# Altium PCB CH32X315MCU-R0-1v0.PcbDoc (part 2 of 2)
Units mil, origin at the board's own origin, x right, y up, seen from the top; angles counter-clockwise.
Board outline 2755.91 x 3228.35 mil, 4 copper layers (Top Layer, Layer 1, Layer 2, Bottom Layer), stack 23.756 mil thick; 75 components, 121 nets, 391 pads, 568 vias.
Unrouted connection lines stored in the file: 7.
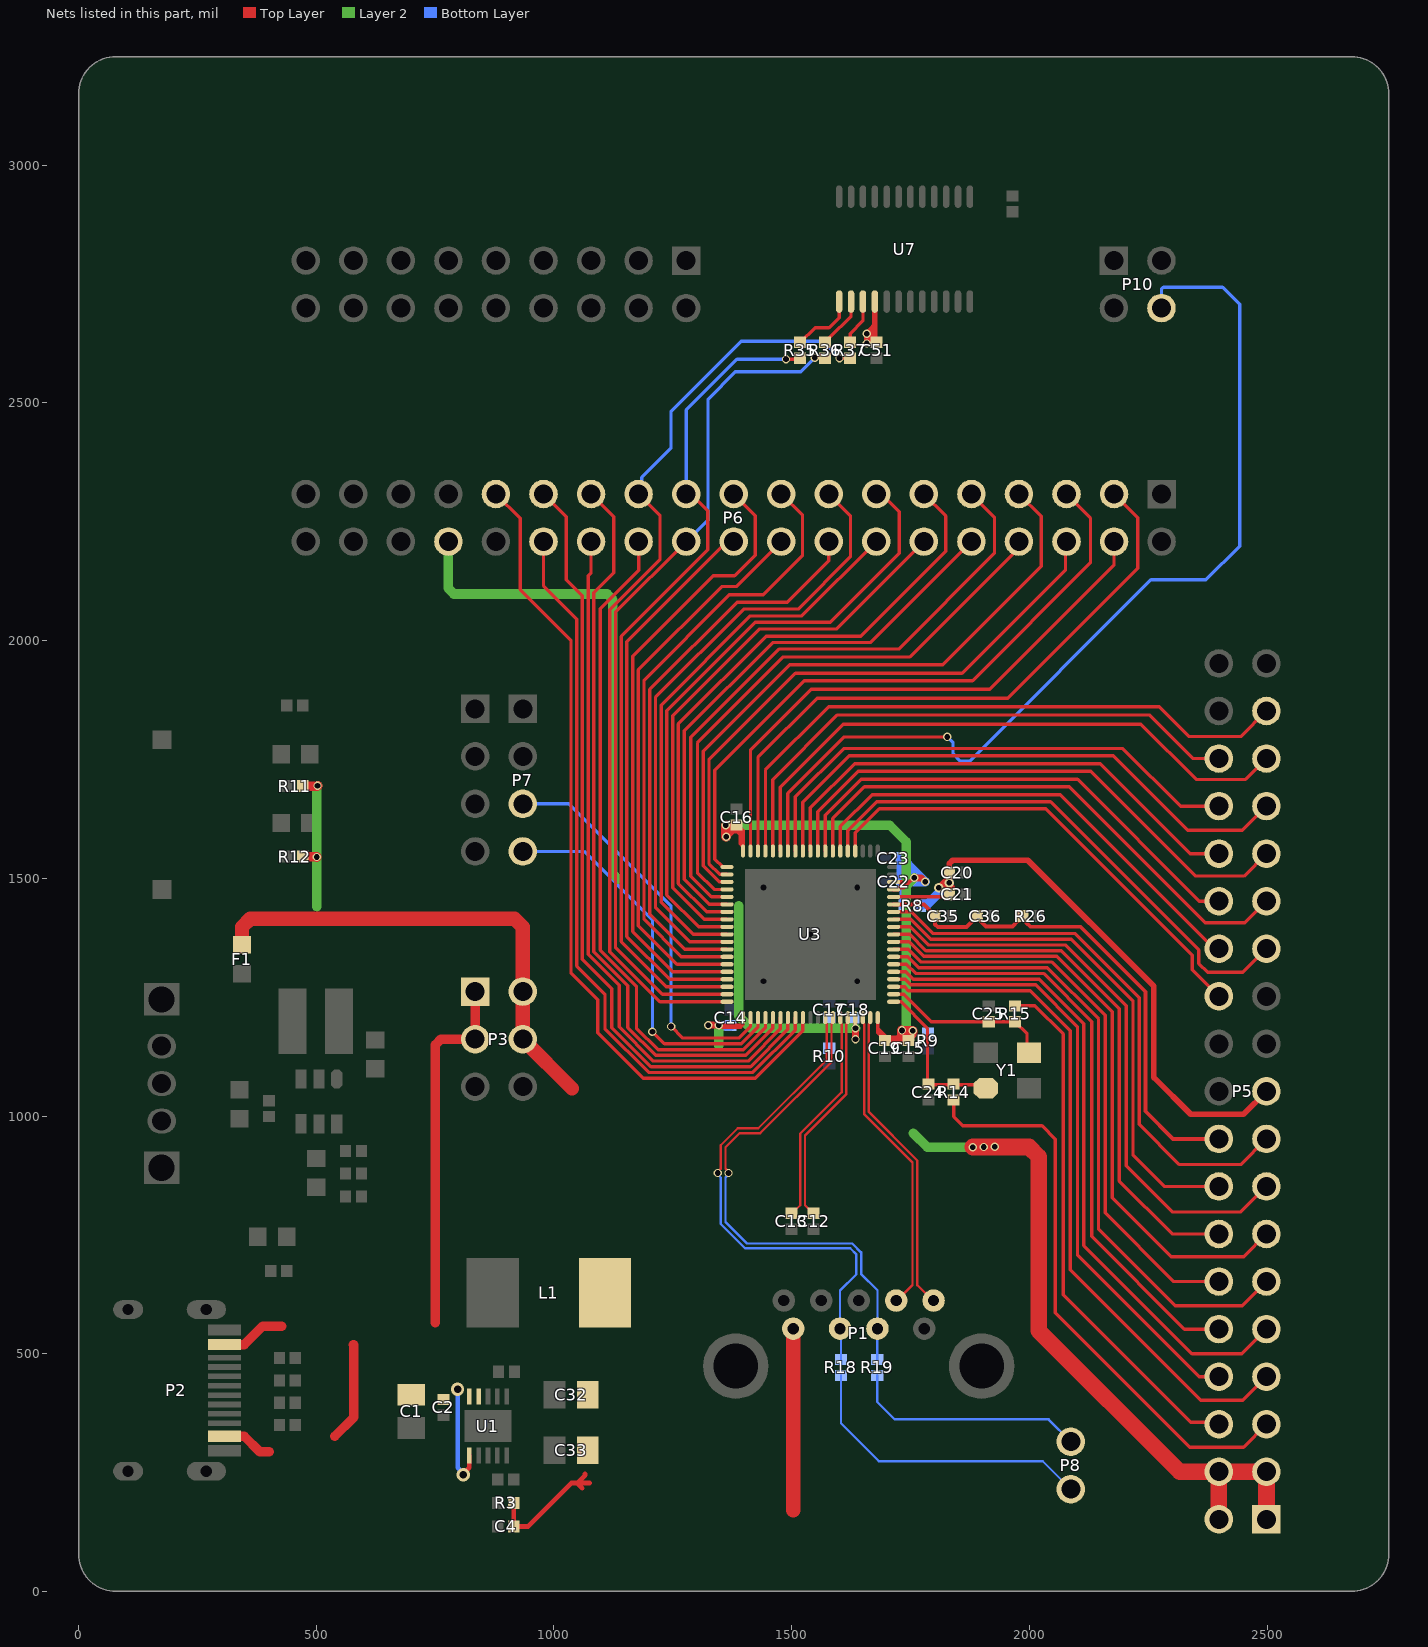
[diagram p4: the nets of this part, all layers, seen from the top]

## Via types
v1: diameter 19.68, hole 11.81, Top Layer to Bottom Layer, tented both sides, 297 vias
v2: diameter 17.72, hole 11.81, Top Layer to Bottom Layer, tented both sides, 257 vias
v3: diameter 23.62, hole 11.81, Top Layer to Bottom Layer, tented both sides, 8 vias
v4: diameter 23.62, hole 11.81, Top Layer to Bottom Layer, 4 vias
v5: diameter 27.56, hole 15.75, Top Layer to Bottom Layer, tented both sides, 2 vias

## Nets (pads, with @x,y where several pads share a name; then routed paths per layer and width w, separated by ;. In a path a pad name is that pad's centre, name@x,y a point inside that pad or via, vN(x,y) a via of type N, cw(c..) or ccw(c..) an arc to the next point about the centre after c; other vN are vias at no path point) (continued)
PA5: P5.24 U3.23 | length 1005.2
  Top Layer w7: U3.23@1633.67,1557.29 1633.67,1595.46 1684.51,1646.29 2034.4,1646.29 2342.39,1338.3 2342.39,1307.9 P5.24@2398.45,1251.84
PA6: P5.25 U3.24 | length 1134.4
  Top Layer w7: U3.24@1617.93,1557.29 1617.93,1599.93 1678.97,1660.97 2044.31,1660.97 2356.12,1349.17 2356.12,1320.73 2374.79,1302.05 2448.66,1302.05 P5.25@2498.45,1351.84
PA7: P5.26 U3.25 | length 1010
  Top Layer w7: U3.25@1602.18,1557.29 1602.18,1609 1669.13,1675.96 2065,1675.96 2389.11,1351.84 P5.26@2398.45,1351.84
PA8: P6.19 U3.53 | length 1305.8
  Top Layer w7: U3.53@1363.99,1303.35 1249.95,1303.35 1165.36,1387.94 1165.36,1966.66 1334.8,2136.1 1379.73,2136.1 1423.25,2179.61 1423.25,2262.91 P6.19@1377.95,2308.21
PA9: P6.20 U3.54 | length 1180
  Top Layer w7: U3.54@1363.99,1287.61 1243.18,1287.61 1153.36,1377.43 1153.36,1997.82 1363.74,2208.21 P6.20@1377.95,2208.21
PA10: P6.21 R35.2 U3.55 | length 1764.9
  Top Layer w7: P6.21@1277.95,2308.21 1288.41,2308.21 1323.52,2273.1 1323.52,2190.79 1141.36,2008.63 1141.36,1366.92 1236.42,1271.86 U3.55@1363.99,1271.86 ; v2(1488.02,2591.54) 1515.25,2591.54 R35.2@1517.47,2593.76
  Bottom Layer w7: P6.21@1277.95,2308.21 1277.95,2353.5 1278.25,2353.79 1278.25,2484.92 1384.86,2591.54 v2(1488.02,2591.54)
PA11: P6.22 R36.2 U3.56 | length 1791.6
  Top Layer w7: P6.22@1277.95,2208.21 1129.36,2059.61 1129.36,1354.94 1228.19,1256.11 U3.56@1363.99,1256.11 ; v2(1548.2,2594.5) 1569.43,2594.5 R36.2@1570.17,2593.76
  Bottom Layer w7: P6.22@1277.95,2208.21 1323.97,2254.22 1323.97,2508.03 1381.47,2565.53 1519.23,2565.53 v2(1548.2,2594.5)
PA12: P6.23 R37.2 U3.57 | length 1969.3
  Top Layer w7: P6.23@1177.95,2308.21 1222.79,2263.37 1222.79,2170.02 1117.36,2064.58 1117.36,1345.81 1222.81,1240.36 U3.57@1363.99,1240.36 ; v2(1600.57,2593.4) 1622.51,2593.4 R37.2@1622.87,2593.76
  Bottom Layer w7: P6.23@1177.95,2308.21 1184.53,2314.79 1184.53,2343.11 1246.06,2404.63 1246.06,2481.29 1393.96,2629.19 1564.77,2629.19 v2(1600.57,2593.4)
PA13: P7.3 U3.59 | length 859.7
  Top Layer w7: v2(1246.19,1188.3) 1270.51,1163.98 1388.96,1163.98 1413.2,1188.22 U3.59@1413.2,1206.9
  Bottom Layer w7: P7.3@934.34,1656.48 1030.87,1656.48 1246.19,1441.15 v2(1246.19,1188.3)
PA14: P7.4 U3.60 | length 834.5
  Top Layer w7: v2(1207.07,1177.24) 1232.34,1151.98 1393.93,1151.98 1428.95,1186.99 U3.60@1428.95,1206.9
  Bottom Layer w7: P7.4@934.34,1556.48 1063.25,1556.48 1207.07,1412.66 v2(1207.07,1177.24)
PA15: P6.24 U3.61 | length 1418.7
  Top Layer w7: P6.24@1177.95,2208.21 1177.95,2147.58 1097.19,2066.82 1097.19,1349.01 1173.53,1272.67 1173.53,1184.83 1218.83,1139.52 1398.45,1139.52 1444.7,1185.77 U3.61@1444.7,1206.9
PB0: P5.27 U3.26 | length 1145.6
  Top Layer w7: U3.26@1586.43,1557.29 1586.43,1625.77 1653.08,1692.42 2083.42,1692.42 2369.66,1406.18 2452.79,1406.18 P5.27@2498.45,1451.84
PB1: P5.28 U3.27 | length 1040.4
  Top Layer w7: U3.27@1570.68,1557.29 1570.68,1632.31 1646.57,1708.2 2101.08,1708.2 2357.43,1451.84 P5.28@2398.45,1451.84
PB2: P5.29 U3.28 | length 1172.4
  Top Layer w7: U3.28@1554.93,1557.29 1554.93,1640.27 1639.65,1724.99 2129.35,1724.99 2349.64,1504.7 2451.31,1504.7 P5.29@2498.45,1551.84
PB3: P5.30 U3.29 | length 1067.1
  Top Layer w7: U3.29@1539.19,1557.29 1539.19,1648.2 1632.16,1741.17 2149.02,1741.17 2338.35,1551.84 P5.30@2398.45,1551.84
PB4: P5.31 U3.30 | length 1204.2
  Top Layer w7: U3.30@1523.44,1557.29 1523.44,1660.32 1620.88,1757.76 2176.59,1757.76 2333.12,1601.24 2447.85,1601.24 P5.31@2498.45,1651.84
PB5: P5.32 U3.31 | length 1097
  Top Layer w7: U3.31@1507.69,1557.29 1507.69,1671.29 1609.31,1772.91 2196.66,1772.91 2317.73,1651.84 P5.32@2398.45,1651.84
PB6: P10.4 U3.32 | length 2072.1
  Top Layer w7: U3.32@1491.94,1557.29 1491.94,1678.39 1610.82,1797.27 v2(1827.33,1797.27)
  Bottom Layer w7: v2(1827.33,1797.27) 1839.28,1785.32 1839.28,1761.78 1854.42,1746.64 1874.48,1746.64 2255.56,2127.72 2371.31,2127.72 2442.14,2198.55 2442.14,2707.19 2406.07,2743.25 2281.79,2743.25 2277.69,2739.15 P10.4@2277.69,2699.25
PB7: P5.33 U3.33 | length 1278
  Top Layer w7: U3.33@1476.19,1557.29 1476.19,1691.8 1608.66,1824.27 2234.57,1824.27 2350.89,1707.95 2454.55,1707.95 P5.33@2498.45,1751.84
PB8: P6.9 U3.43 | length 1331
  Top Layer w7: U3.43@1363.99,1460.83 1331.12,1460.83 1287.37,1504.58 1287.37,1796.36 1473.12,1982.1 1725.41,1982.1 1926.49,2183.19 1926.49,2259.67 P6.9@1877.95,2308.21
PB9: P6.10 U3.44 | length 1192.6
  Top Layer w7: U3.44@1363.99,1445.09 1326.69,1445.09 1274.3,1497.48 1274.3,1810.08 1459.96,1995.74 1665.48,1995.74 P6.10@1877.95,2208.21
PB10: P6.11 U3.45 | length 1315.1
  Top Layer w7: U3.45@1363.99,1429.34 1321.23,1429.34 1261.64,1488.93 1261.64,1824.62 1446.05,2009.03 1645.14,2009.03 1824.16,2188.05 1824.16,2262.01 P6.11@1777.95,2308.21
PB11: P6.12 U3.46 | length 1184.1
  Top Layer w7: U3.46@1363.99,1413.59 1315.88,1413.59 1249.64,1479.82 1249.64,1842.22 1431.67,2024.25 1594,2024.25 P6.12@1777.95,2208.21
PB12: P6.25 U3.62 | length 1564.1
  Top Layer w7: P6.25@1077.95,2308.21 1125.42,2260.74 1125.42,2142.37 1083.72,2100.67 1083.72,1345.51 1155.34,1273.89 1155.34,1186.05 1213.86,1127.52 1403.42,1127.52 1460.45,1184.55 U3.62@1460.45,1206.9
PB13: P6.26 U3.63 | length 1471
  Top Layer w7: P6.26@1077.95,2208.21 1077.95,2142.33 1071.72,2136.1 1071.72,1340.53 1137.14,1275.12 1137.14,1187.27 1208.89,1115.52 1408.39,1115.52 1476.19,1183.33 U3.63@1476.19,1206.9
PB14: P6.27 U3.64 | length 1643.6
  Top Layer w7: P6.27@977.95,2308.21 1025.8,2260.36 1025.8,2128.04 1059.72,2094.11 1059.72,1329.96 1121.68,1268 1121.68,1185.77 1203.92,1103.52 1413.36,1103.52 1491.94,1182.1 U3.64@1491.94,1206.9
PB15: P6.28 U3.65 | length 1580
  Top Layer w7: P6.28@977.95,2208.21 977.95,2114.63 1047.72,2044.86 1047.72,1315.4 1107.25,1255.87 1107.25,1183.22 1198.95,1091.52 1418.33,1091.52 1507.69,1180.88 U3.65@1507.69,1206.9
PC0: P5.10 U3.6 | length 1266.3
  Top Layer w7: U3.6@1714.38,1319.1 1741.1,1319.1 1760.44,1299.77 2029.59,1299.77 2130.86,1198.5 2130.86,747.07 2326.09,551.84 P5.10@2398.45,551.84
PC1: P5.11 U3.7 | length 1368.4
  Top Layer w7: U3.7@1714.38,1334.85 1744.39,1334.85 1767.47,1311.77 2037.64,1311.77 2145.33,1204.09 2145.33,761.77 2306.33,600.77 2447.37,600.77 P5.11@2498.45,651.84
PC2: P5.12 U3.8 | length 1217.1
  Top Layer w7: U3.8@1714.38,1350.6 1745.61,1350.6 1772.44,1323.77 2047.52,1323.77 2159.32,1211.97 2159.32,796.11 2303.6,651.84 P5.12@2398.45,651.84
PC3: P5.13 U3.9 | length 1307.3
  Top Layer w7: U3.9@1714.38,1366.35 1746.83,1366.35 1777.41,1335.77 2057.4,1335.77 2174.17,1219 2174.17,827.79 2297.85,704.11 2450.71,704.11 P5.13@2498.45,751.84
PC4: P5.14 U3.10 | length 1157.5
  Top Layer w7: U3.10@1714.38,1382.09 1748.06,1382.09 1782.38,1347.77 2066.92,1347.77 2188.8,1225.9 2188.8,863.27 2300.22,751.84 P5.14@2398.45,751.84
PC5: P5.15 U3.11 | length 1251.9
  Top Layer w7: U3.11@1714.38,1397.84 1749.28,1397.84 1787.35,1359.77 2075.39,1359.77 2203.46,1231.7 2203.46,895.03 2300.26,798.23 2444.83,798.23 P5.15@2498.45,851.84
PC6: P5.16 U3.12 | length 1106.7
  Top Layer w7: U3.12@1714.38,1413.59 1750.5,1413.59 1792.32,1371.77 2087.74,1371.77 2217.98,1241.53 2217.98,917.2 2283.34,851.84 P5.16@2398.45,851.84
PC7: P5.17 U3.13 | length 1182.5
  Top Layer w7: U3.13@1714.38,1429.34 1751.72,1429.34 1797.29,1383.77 2096.03,1383.77 2230.63,1249.16 2230.63,982.79 2315.44,897.99 2444.6,897.99 P5.17@2498.45,951.84
PC8: P5.34 U3.34 | length 1186.5
  Top Layer w7: U3.34@1460.45,1557.29 1460.45,1707.66 1596.28,1843.49 2252.4,1843.49 2344.04,1751.84 2388.63,1751.84 P5.34@2398.34,1742.13
PC9: P5.35 U3.35 | length 1327.8
  Top Layer w7: U3.35@1444.7,1557.29 1444.7,1727.9 1577.88,1861.09 2272.74,1861.09 2335.66,1798.16 2444.76,1798.16 P5.35@2498.45,1851.84
PC10: P6.3 U3.36 | length 1337.3
  Top Layer w7: U3.36@1428.95,1557.29 1428.95,1754.12 1553.31,1878.48 1954.06,1878.48 2227.89,2152.31 2227.89,2258.27 P6.3@2177.95,2308.21
PC11: P6.4 U3.37 | length 1187.4
  Top Layer w7: U3.37@1413.2,1557.29 1413.2,1769.74 1541.11,1897.65 1916.2,1897.65 2177.95,2159.41 P6.4@2177.95,2208.21
PC12: P6.5 U3.39 | length 1356.2
  Top Layer w7: U3.39@1363.99,1523.83 1354.54,1523.83 1338.02,1540.35 1338.02,1726.88 1526.41,1915.28 1880.33,1915.28 2128.31,2163.26 2128.31,2257.85 P6.5@2077.95,2308.21
PC13: P6.6 U3.40 | length 1241.4
  Top Layer w7: U3.40@1363.99,1508.08 1363.67,1508.4 1348.54,1508.4 1326.02,1530.92 1326.02,1749.5 1507.93,1931.42 1858.22,1931.42 2075.94,2149.14 2075.94,2206.2 P6.6@2077.95,2208.21
PC14: P6.7 U3.41 | length 1348.4
  Top Layer w7: U3.41@1363.99,1492.33 1363.67,1492.65 1347.32,1492.65 1314.02,1525.95 1314.02,1767.4 1496.03,1949.42 1817.91,1949.42 2024.6,2156.11 2024.6,2261.56 P6.7@1977.95,2308.21
PC15: P6.8 U3.42 | length 1209.4
  Top Layer w7: U3.42@1363.99,1476.58 1337.08,1476.58 1301.68,1511.98 1301.68,1784.66 1482.44,1965.42 1748.9,1965.42 1977.95,2194.47 P6.8@1977.95,2208.21
PD0: P5.5 R14.1 | length 1214.8
  Top Layer w7: R14.1@1840.52,1033.67 1840.52,998.85 1859.9,979.47 2026.43,979.47 2054.44,951.45 2054.44,585.89 2336.68,303.65 2450.26,303.65 P5.5@2498.45,351.84
PD1: P5.6 R15.1 | length 1114.7
  Top Layer w7: R15.1@1969.53,1231.65 2011.67,1231.65 2070.77,1172.55 2070.77,624.01 2338.91,355.86 2394.43,355.86 P5.6@2398.45,351.84
PD2: P5.7 U3.3 | length 1459.5
  Top Layer w7: U3.3@1714.38,1271.86 1737.44,1271.86 1745.52,1263.77 2002.08,1263.77 2086.07,1179.78 2086.07,676.52 2360.21,402.38 2448.99,402.38 P5.7@2498.45,451.84
PD3: P6.29 U3.66 | length 1761.5
  Top Layer w7: P6.29@877.95,2308.21 929.1,2257.06 929.1,2107.33 1035.72,2000.7 1035.72,1300.84 1092.06,1244.51 1092.06,1175.01 1187.54,1079.52 1423.3,1079.52 1523.44,1179.66 U3.66@1523.44,1206.9
PD6: P8.1 R18.2 | length 641.5
  Bottom Layer w5: R18.2@1603.63,454.41 1603.63,353.76 1683.35,274.04 2028.1,274.04 P8.1@2087.05,215.09
PD7: P8.2 R19.2 | length 497.4
  Bottom Layer w5: R19.2@1679.94,454.41 1679.94,398.77 1716.83,361.89 2040.25,361.89 P8.2@2087.05,315.09
PD8: P6.13 U3.47 | length 1319.1
  Top Layer w7: U3.47@1363.99,1397.84 1304.31,1397.84 1237.36,1464.8 1237.36,1852.34 1423.6,2038.58 1581.26,2038.58 1726.13,2183.46 1726.13,2271.16 1689.09,2308.21 P6.13@1677.95,2308.21
PD9: P6.14 U3.48 | length 1176.2
  Top Layer w7: U3.48@1363.99,1382.09 1293.06,1382.09 1225.36,1449.8 1225.36,1864.34 1412.78,2051.76 1521.51,2051.76 P6.14@1677.95,2208.21
PD10: P6.15 U3.49 | length 1305.9
  Top Layer w7: U3.49@1363.99,1366.35 1285.81,1366.35 1213.36,1438.8 1213.36,1880.35 1399.3,2066.29 1513.81,2066.29 1623.53,2176.01 1623.53,2262.64 P6.15@1577.95,2308.21
PD11: P6.16 U3.50 | length 1195.1
  Top Layer w7: U3.50@1363.99,1350.6 1275.13,1350.6 1201.36,1424.37 1201.36,1897.07 1385.16,2080.87 1491.06,2080.87 1577.95,2167.76 P6.16@1577.95,2208.21
PD12: P6.17 U3.51 | length 1300.6
  Top Layer w7: U3.51@1363.99,1334.85 1267.88,1334.85 1189.36,1413.37 1189.36,1917.03 1368.67,2096.34 1440.1,2096.34 1522.86,2179.09 1522.86,2263.3 P6.17@1477.95,2308.21
PD13: P6.18 U3.52 | length 1170.5
  Top Layer w7: U3.52@1363.99,1319.1 1258.67,1319.1 1177.36,1400.41 1177.36,1938.14 1352.78,2113.56 1383.31,2113.56 P6.18@1477.95,2208.21
PD14: P5.8 U3.4 | length 1311.2
  Top Layer w7: U3.4@1714.38,1287.61 1738.66,1287.61 1750.49,1275.77 2013.05,1275.77 2101,1187.82 2101,708.19 2357.35,451.84 P5.8@2398.45,451.84
PD15: P5.9 U3.5 | length 1411.5
  Top Layer w7: U3.5@1714.38,1303.35 1739.88,1303.35 1755.46,1287.77 2020.76,1287.77 2114.47,1194.06 2114.47,727.48 2341.75,500.19 2446.8,500.19 P5.9@2498.45,551.84
SEL0: R35.1 U7.1 | length 137.7
  Top Layer w7: R35.1@1517.47,2627.22 1518.46,2627.22 1549.16,2657.93 1578.6,2657.93 1599.76,2679.09 U7.1@1599.76,2712.97
SEL1: R36.1 U7.2 | length 108.9
  Top Layer w7: R36.1@1570.17,2627.22 1571.15,2627.22 1579.47,2635.54 1579.47,2636.52 1624.76,2681.81 U7.2@1624.76,2712.97
SEL2: R37.1 U7.3 | length 96.9
  Top Layer w7: R37.1@1622.87,2627.22 1622.87,2645.8 1649.76,2672.69 U7.3@1649.76,2712.97
SSRXA: P1.5 U3.75 | length 653.7
  Top Layer w5: U3.75@1665.17,1206.9 1665.17,1196.46 1662.3,1193.58 1662.3,1008.33 1764.07,906.55 1764.07,644.38 1796.6,611.85 P1.5@1798.44,611.85
SSRXB: P1.6 U3.74 | length 653.7
  Top Layer w5: U3.74@1649.42,1206.9 1649.42,1196.46 1652.3,1193.58 1652.3,1004.19 1754.07,902.41 1754.07,644.38 1721.55,611.85 P1.6@1719.7,611.85
SSTXA: C12.2 U3.72 | length 456.9
  Top Layer w5: C12.2@1545.85,795.33 1544.87,795.33 1527.85,812.34 1527.85,958.84 1615.05,1046.04 1615.05,1193.58 1617.93,1196.46 U3.72@1617.93,1206.9
SSTXB: C13.2 U3.71 | length 456.9
  Top Layer w5: C13.2@1499.85,795.33 1500.84,795.33 1517.85,812.34 1517.85,962.98 1605.05,1050.18 1605.05,1193.58 1602.18,1196.46 U3.71@1602.18,1206.9
USBHS_DM: P1.2 R18.1 U3.69 | length 1105.9
  Top Layer w5: v2(1344.39,880.06) 1344.39,882.99 1350.75,889.35 1350.75,938.39 1386.45,974.09 1429.57,974.09 1573.56,1118.08 1573.56,1193.58 1570.68,1196.46 U3.69@1570.68,1206.9
  Bottom Layer w5: v2(1344.39,880.06) 1344.39,877.14 1350.75,870.78 1350.75,772.81 1401.69,721.87 1623.02,721.87 1635.96,708.93 1635.96,667.23 1601.59,632.86 P1.2@1601.59,552.8 1603.63,550.76 R18.1@1603.63,487.87
USBHS_DP: P1.3 R19.1 U3.70 | length 1105.2
  Top Layer w5: v2(1367.11,880.06) 1367.11,882.99 1360.75,889.35 1360.75,934.25 1390.59,964.09 1433.71,964.09 1583.56,1113.93 1583.56,1193.58 1586.43,1196.46 U3.70@1586.43,1206.9
  Bottom Layer w5: v2(1367.11,880.06) 1367.11,877.14 1360.75,870.78 1360.75,776.95 1405.84,731.87 1627.17,731.87 1645.96,713.07 1645.96,667.97 1680.33,633.6 P1.3@1680.33,552.8 1679.94,552.4 R19.1@1679.94,487.87
VBUS_CC: C1.2 C2.2 P2.A4 P2.B4 P3.1 P3.3 U1.1 U1.9 U1.10 | length 1441
  Top Layer w10: v5(809.18,245.44) 809.18,247.47 821.79,260.08 U1.1@821.79,285.73
  Top Layer w20: P2.B4@307.04,326.42 348.45,326.42 380.7,294.17 401.33,294.17 ; P2.A4@307.04,519.33 348.5,519.33 386.96,557.8 427.83,557.8 ; 539,326.42 578.83,366.25 578.83,519.33 ; 578.04,519.33 578.83,518.54 ; 750.56,565.65 750.56,1149.94 762.27,1161.66 P3.3@817.34,1161.66 ; P3.3@834.34,1161.66 P3.1@834.34,1261.66
  Bottom Layer w10: v5(797.43,425.22) 797.43,260.08 809.18,248.33 v5(809.18,245.44)
VBUS_USB: C4.1 C32.2 C33.2 F1.1 L1.2 P1.1 P3.2 P3.4 R3.2 | length 1695.1
  Top Layer w10: R3.2@915.2,186.31 C4.1@915.2,136.81 945.35,136.81 1036.42,227.87 1048.93,227.87 ; 1059.66,217.15 1048.93,227.87 ; 1065.38,246.99 1065.38,244.32 1048.93,227.87 ; 1075.18,227.87 1048.93,227.87
  Top Layer w30: F1.1@343.66,1359.79 343.66,1397.34 361.24,1414.92 916.76,1414.92 934.34,1397.34 P3.2@934.34,1261.66 P3.4@934.34,1161.66 1037.98,1058.02 ; 1503.17,171.08 P1.1@1503.17,552.8
VDD: C14.1 C15.1 C16.2 C19.1 C22.1 C23.1 C51.1 P5.1 P5.2 P5.3 P5.4 R8.1 R9.2 R11.1 R12.1 U3.16 U3.17 U3.38 U3.58 U3.76 U7.4 | length 3913.1
  Top Layer w7: v2(1346.24,1191.19) 1392.52,1191.19 1397.14,1195.8 1397.14,1206.85 U3.58@1397.19,1206.9 ; v2@1346.65,1186.01 1391.65,1186.01 1397.45,1191.81 U3.58@1397.45,1206.9
  Top Layer w8: 1375.2,1597.92 1385.98,1597.92 ; C16.2@1383.72,1611.52 1385.69,1611.52 1397.45,1599.76 U3.38@1397.45,1566.92 ; C16.2@1384.8,1602.82 1388.55,1599.07 ; 1385.91,1597.99 1385.98,1597.92 ; U3.38@1397.45,1557.29 U3.38@1397.45,1566.92 ; U3.76@1680.92,1206.9 1680.92,1183.88 ; C19.1@1697.65,1159.21 1680.92,1175.93 1680.92,1183.88 ; C19.1@1706.89,1158.89 1705.91,1158.89 1680.92,1183.88 ; U3.16@1714.38,1476.58 1724.01,1476.58 1728.01,1480.58 1735.18,1480.58 1735.49,1480.89 1735.49,1484.46 ; U3.17@1714.38,1492.33 1730.84,1492.33 1738.72,1484.46 1739.43,1484.46 1756.04,1501.07 v2(1758.02,1501.07) ; v2@1781,1492.49 v2(1781,1493) ; 1385.98,1597.92 1391.81,1592.09 ; 1385.98,1597.92 1387.39,1597.92 1388.55,1599.07 ; 1388.55,1599.07 1391.81,1595.81 1391.81,1592.09 ; 1391.81,1592.09 1391.81,1572.57 U3.38@1397.45,1566.92
  Top Layer w12: U7.4@1674.76,2712.97 1674.76,2673.66 ; C51.1@1678.57,2627.22 C51.1@1674.76,2631.04 ; v2@1658.12,2626.32 v2(1658.12,2645.45) 1666.44,2653.77 ; v2@1658.12,2626.32 1666.44,2634.63 1666.44,2639.35 ; v2@1658.12,2626.32 v2(1658.12,2624.77) 1659.21,2625.86 1671.77,2625.86 1674.76,2628.85 C51.1@1674.76,2631.04 ; 1666.44,2639.35 1666.44,2653.77 ; 1666.44,2639.35 1671.77,2634.02 1671.77,2633.04 1673.77,2631.04 C51.1@1674.76,2631.04 ; 1666.44,2653.77 1674.76,2662.09 1674.76,2673.66 ; C51.1@1674.76,2631.04 1674.76,2673.66
  Top Layer w15: v2(1324.49,1190.97) 1324.6,1191.08 1346.13,1191.08 v2(1346.24,1191.19) ; v2(1758.02,1501.07) 1758.54,1500.55 1772.71,1500.55 1780.26,1493 v2(1781,1493)
  Top Layer w20: R12.1@471.34,1545.55 500.51,1545.55 v2(501.34,1544.71) ; R11.1@471.34,1693.78 502,1693.78 v2(502.64,1694.41) ; C16.2@1384.21,1612.01 1383.72,1611.52 C16.2@1382.74,1611.52 ; C19.1@1706.89,1158.89 1723.25,1158.89 ; C15.1@1740.03,1158.48 C15.1@1739.62,1158.89 ; C15.1@1745.67,1158.89 1744.69,1158.89 C15.1@1742.15,1161.43 ; C16.2@1382.74,1611.52 v2(1361.58,1611.52) 1361.58,1587.51 v2(1361.98,1587.1) 1361.98,1590.76 C16.2@1382.74,1611.52 ; 1723.25,1158.89 C15.1@1739.62,1158.89 ; 1723.25,1158.89 1731.93,1167.57 v2@1731.93,1171.65 ; v2@1731.93,1171.65 C15.1@1742.15,1161.43 ; v2@1731.93,1171.65 v2(1731.93,1179.94) 1732.38,1179.5 v2(1754.29,1179.5) 1754.29,1173.57 C15.1@1742.15,1161.43 ; C15.1@1739.62,1158.89 C15.1@1742.15,1161.43
  Top Layer w35: v2@1881.03,934.75 v2(1903.9,934.75) 1999.15,934.75 2019.65,914.24 2019.65,548.26 2316.07,251.84 P5.4@2398.45,251.84 ; P5.2@2404.21,155.57 2398.45,161.33 P5.4@2398.45,251.84 ; P5.1@2498.45,151.84 P5.3@2498.45,251.84 P5.4@2398.45,251.84
  Layer 2 w20: 501.34,1440.4 v2(501.34,1544.71) 501.34,1693.12 v2(502.64,1694.41) ; 1346.24,1147.49 v2(1346.24,1191.19) ; v2(1361.98,1587.1) 1361.98,1611.12 v2(1361.58,1611.52) 1706.13,1611.52 1740.91,1576.74 1740.91,1483.95 ; 1739.62,1158.89 1740.91,1160.18 1740.91,1483.95 ; 1756.09,963.6 1784.94,934.75 v2@1902.34,934.75 ; v2(1758.02,1501.07) 1740.91,1483.95
  Bottom Layer w20: v2(1346.24,1191.19) 1347.17,1190.26 C14.1@1371.5,1190.26 ; R8.1@1736.77,1442.33 C22.1@1736.77,1479.81 ; C22.1@1736.77,1479.81 1749.23,1492.27 ; C22.1@1736.77,1479.81 1736.77,1484.19 1744.85,1492.27 ; 1744.85,1492.27 1744.85,1527.98 ; 1744.85,1492.27 1749.23,1492.27 ; 1744.85,1492.27 C22.1@1731,1492.27 1730.56,1492.71 1730.56,1541.88 C23.1@1730.11,1542.33 1730.5,1542.33 1744.85,1527.98 ; 1744.85,1527.98 1758.02,1514.81 ; 1749.23,1492.27 v2(1758.02,1501.07) 1758.02,1514.81 ; 1749.23,1492.27 1780.27,1492.27 v2(1781,1493) 1779.84,1493 1758.02,1514.81
  other v2: 1881.03,934.27 1926.77,934.98
VDDK: C17.1 C18.1 P6.32 R10.1 U3.73 | length 1581.8
  Top Layer w8: U3.73@1633.67,1206.9 1633.8,1206.77 1633.8,1184.63 v2(1634.19,1184.24)
  Top Layer w15: v2(1634.19,1161.2) v2(1634.19,1184.24)
  Layer 2 w20: P6.32@777.95,2208.21 777.95,2109.63 789.67,2097.91 1112.04,2097.91 1123.76,2086.2 1123.76,1509.64 1135.47,1497.92 ; 1388.22,1442.17 1388.22,1210.24 1414.22,1184.24 v2(1634.19,1184.24)
VREF+: C20.1 C21.1 P5.19 R8.2 U3.15 | length 1418.9
  Top Layer w7: U3.15@1714.38,1460.83 C21.1@1823.47,1460.83
  Top Layer w12: C21.1@1831.61,1472.92 1831.61,1480.45 ; v1(1831.52,1490.67) 1831.61,1480.45 ; 1837.2,1480.45 1831.61,1480.45 ; P5.19@2498.45,1051.84 2450.15,1003.55 2339.32,1003.55 2261.69,1081.18 2261.69,1273.01 1996.58,1538.12 1838.64,1538.12 1831.61,1531.09 C20.1@1831.61,1511.94 C20.1@1831.57,1511.9 ; v1@1811.22,1480.45 v1@1818.27,1480.45 ; v1@1811.22,1480.45 1817.47,1486.7 ; v1@1811.22,1480.45 v1(1809.14,1480.45) 1817.47,1488.78 ; 1817.47,1486.7 1819.97,1489.2 1830.05,1489.2 v1(1831.52,1490.67) ; 1817.47,1486.7 1817.47,1488.78 ; 1817.47,1486.7 1817.47,1481.25 v1@1818.27,1480.45 ; 1817.47,1488.78 1825.8,1497.11 1825.8,1506.13 C20.1@1831.57,1511.9 ; v1@1818.27,1480.45 1831.57,1480.45 ; v1@1818.27,1480.45 C21.1@1831.57,1467.16 ; v1(1831.52,1490.67) 1831.57,1490.63 1831.57,1480.45 ; v1(1831.52,1490.67) v1(1831.52,1490.67) C20.1@1831.57,1511.9 ; C21.1@1831.57,1467.16 1831.57,1480.45 ; C21.1@1831.57,1467.16 1831.57,1466.17 C21.1@1831.61,1466.13 1831.61,1467.11 C21.1@1831.57,1467.16
  Bottom Layer w20: R8.2@1770.23,1442.33 1770.23,1443.31 1772.05,1445.12 1785.12,1445.12 v1@1831.09,1491.1
VREF-: C35.1 C36.1 P5.18 R26.2 U3.14 | length 1092.4
  Top Layer w8: U3.14@1714.38,1445.09 1778.06,1445.09 1793.8,1429.35 1793.8,1428.29 C35.1@1801.61,1420.48 1801.61,1402.78 1807.04,1397.36 1867.31,1397.36 1881.14,1411.18 1882.12,1411.18 C36.1@1886.28,1415.34 ; C36.1@1890.43,1420.48 1890.43,1419.5 C36.1@1886.28,1415.34 ; P5.18@2398.45,951.84 2301.91,951.84 2243.86,1009.89 2243.86,1261.37 2107.16,1398.07 2001.87,1398.07 1994.08,1405.87 1994.08,1407 1993.58,1407.5 1993.58,1412.67 R26.2@1985.76,1420.48 1985.76,1419.49 1983.11,1416.84 1977.45,1411.18 1976.47,1411.18 1964.1,1398.82 1939.57,1398.82 1939.43,1398.68 1908.36,1398.68 1898.24,1408.8 1898.24,1411.68 1894.59,1415.34 C36.1@1886.28,1415.34
XI: C24.1 R14.2 U3.1 Y1.1 | length 339.1
  Top Layer w7: U3.1@1714.38,1240.36 1730.28,1240.36 1785.56,1185.07 1785.56,1066.01 1840.52,1066.01 1900.84,1066.01 Y1.1@1908.41,1058.44
XO: C25.1 R15.2 U3.2 Y1.3 | length 356.3
  Top Layer w7: U3.2@1714.38,1256.11 1735.45,1256.11 1793.37,1198.18 C25.1@1914.27,1198.18 R15.2@1969.53,1198.18 1995.03,1172.68 1995.03,1137.18 Y1.3@1998.96,1133.24
pads on no net: P2.A6 P2.A7 P2.A8 P2.B6 P2.B7 P2.B8 S1.0 S1.3 U1.2 U1.3 U2.1

## Polygon pours and split planes (outlines as drawn)
GND on Top Layer "GND" (solid, remove dead copper, pour order 11): 0,78.74 0,3149.61 cw(c78.74,3149.61) 78.74,3228.35 2677.17,3228.35 cw(c2677.17,3149.61) 2755.91,3149.61 2755.91,78.74 cw(c2677.17,78.74) 2677.17,0 78.74,0 cw(c78.74,78.74)
VBUS_USB on Top Layer "5V" (solid, remove dead copper, pour order 1): 1065.21,152.73 1050.58,167.36 1050.58,730.77 1002.59,778.75 1002.59,1065.22 956.78,1111.03 892.81,1111.03 887.71,1116.13 887.71,1322.7 868.93,1341.48 322.68,1341.48 314.37,1349.79 314.37,1441.91 319.79,1447.29 971.73,1447.29 981.13,1437.89 981.13,1213.92 1134.38,1060.68 1134.38,837.19 1170.38,801.19 1170.38,323.6 1197.44,296.54 1434.75,296.54 1455.1,316.89 1455.1,558.6 1469.74,573.24 1544.85,573.24 1552.58,565.5 1552.58,165.19 1540.12,152.73
VBUS_CC on Top Layer "VBUS_CC" (solid, remove dead copper, pour order 0): 791.42,487.4 818.77,460.06 837.53,460.06 845.28,452.31 845.28,394.76 842.12,391.59 664.9,391.59 651.14,377.84 651.14,259.71 642.95,251.52 376.59,251.52 367.54,260.57 367.54,293.25 348.06,312.73 283.37,312.73 285.93,337.71 494.92,337.71 504.41,347.2 504.41,490.98 488.12,507.27 276.47,507.27 273.64,510.1 273.64,531.13 273.33,531.45 348.93,531.45 357.64,540.15 357.64,603.43 365.8,611.59 698.96,611.59 714.35,627.35 714.35,1277.38 733.72,1296.75 865.39,1296.75 867.87,1294.26 867.87,1140.87 855.44,1128.44 807.16,1128.44 791.42,1112.71
GND on Layer 2 "GND" (solid, remove dead copper, pour order 13): 0,78.74 0,3149.61 cw(c78.74,3149.61) 78.74,3228.35 2677.17,3228.35 cw(c2677.17,3149.61) 2755.91,3149.61 2755.91,78.74 cw(c2677.17,78.74) 2677.17,0 78.74,0 cw(c78.74,78.74)
VDD on Layer 2 "VDD" (solid, remove dead copper, pour order 4): 1622.33,2655.59 1709.62,2655.59 1716.57,2648.64 1716.57,2509.56 1753.39,2472.74 1753.39,1692.19 1792.02,1654.25 1792.02,1389.67 1807.38,1374.39 1807.38,973.25 1812.16,969.53 1940.31,969.53 1944.74,965.1 1944.74,902.67 1944.29,902.22 1736.1,902.22 1642.54,995.78 1283.27,995.78 1278.37,1000.68 1278.37,1328.13 1269.01,1337.49 483.89,1337.49 471.33,1350.05 471.33,1706.58 477.08,1712.33 519.49,1712.33 524.53,1707.3 524.53,1405.31 528.76,1401.08 1351.35,1401.08 1357.83,1393.82 1357.83,1153.3 1370.76,1140.37 1678.13,1140.37 1686.79,1149.02 1686.79,1533.8 1680.36,1539.94 1349.79,1539.94 1338.31,1551.41 1338.31,1644.45 1344.57,1650.19 1600.44,1650.19 1615.89,1665.65 1615.89,2649.14
VDDK on Layer 2 "VDDK" (solid, remove dead copper, pour order 5): 1182.75,1504.42 1188.21,1498.95 1409.03,1498.95 1413.52,1494.98 1413.52,1204.83 1417.66,1200.69 1659.96,1200.69 1662.91,1197.74 1662.91,1152.89 1659.58,1150.49 1379.32,1150.49 1367.77,1162.04 1367.77,1408.13 1365.51,1410.39 1089.12,1410.39 1086.2,1413.31 1086.2,2026.65 1081.73,2031.12 754.14,2031.12 746.42,2038.84 746.42,2226.84 754.14,2234.55 805.35,2234.55 810.96,2228.94 810.96,2144.06 818.68,2136.34 1175.03,2136.34 1182.75,2128.63
1V2 on Layer 2 "1V2" (solid, remove dead copper, pour order 3): 1267.74,1077.28 1269.83,1075.2 1269.83,997.12 1266.12,993.42 1090.8,993.42 1078.23,980.85 1078.23,913.03 1071.14,905.94 641.21,905.94 622.32,924.83 622.32,1168.63 616.74,1174.21 602.74,1174.21 595.58,1181.36 595.58,1216.82 597.58,1219.4 708.51,1219.4 715.31,1212.6 715.31,1013.25 723.68,1004.87 952.34,1004.87 1024.74,1077.28
3V3 on Layer 2 "3V3" (solid, remove dead copper, pour order 2): 359.15,1903.29 366.98,1911.11 889.78,1911.11 895.2,1905.69 895.2,1823.29 899.69,1818.74 969.19,1818.74 983.69,1833.24 983.69,1965.01 978.71,1970 274.9,1970 266.02,1960.42 266.02,856.07 297.64,824.45 1149.59,824.45 1159.49,834.35 1159.49,908.77 1170.96,920.23 1542.9,920.23 1661.76,801.37 2312.7,801.37 2317.84,806.5 2317.84,2332.18 2307,2343.01 2241.58,2343.01 2235.54,2336.97 2235.54,915.26 2213.56,893.28 1722.42,893.28 1632.48,983.22 1095.86,983.22 1091.82,979.18 1091.82,894.97 1090.13,893.28 536.01,893.28 498.61,930.67 374.31,930.67 359.15,945.83
GND on Bottom Layer "GND" (solid, remove dead copper, pour order 14): 0,78.74 0,3149.61 cw(c78.74,3149.61) 78.74,3228.35 2677.17,3228.35 cw(c2677.17,3149.61) 2755.91,3149.61 2755.91,78.74 cw(c2677.17,78.74) 2677.17,0 78.74,0 cw(c78.74,78.74)
3V3 on Bottom Layer "3V3" (solid, remove dead copper, pour order 9): 1756.73,1149.96 1758.85,1152.09 1800.34,1152.09 1804.96,1147.47 1804.96,904.15 1816.97,892.14 1903.49,892.14 1907.62,888 1907.62,832.88 1904.91,830.17 1762.1,830.17 1756.73,835.54
GND on Layer 1 "GND" (solid, remove dead copper, pour order 12): 0,78.74 0,3149.61 cw(c78.74,3149.61) 78.74,3228.35 2677.17,3228.35 cw(c2677.17,3149.61) 2755.91,3149.61 2755.91,78.74 cw(c2677.17,78.74) 2677.17,0 78.74,0 cw(c78.74,78.74)

## Keep-outs
Keep-Out Layer:
  the board outline again, w10

## Other copper
Top Layer:
  rectangle net GND: 897.42,277.02 928.94,332.81
  pour cut-out: 913.17,271.52 894.38,271.52 894.38,260.02 896.85,257.56 896.85,216.65 901.54,211.96 956.1,211.96 959.89,215.76 959.89,260.28 956.1,264.07 920.62,264.07
  pour cut-out: 1555.74,1225.3 1555.74,1152.47 1406.77,1003.5 1227.18,1003.5 1160.15,936.47 1160.15,813.98 1189.11,785.02 1404.29,785.02 1433.52,755.79 1433.52,594.1 1441,586.62 1581.95,586.62 1594.42,599.09 1594.42,637.13 1601.28,643.99 1679.23,643.99 1683.6,639.63 1683.6,591.6 1692.33,582.87 1829.53,582.87 1853.86,607.2 1853.86,879.73 1684.52,1049.07 1684.52,1211.39 1668.41,1227.5 1558.84,1227.5
  region net GND: 669.61,365.16 725.02,365.16 738.55,378.68 907.85,378.68 958.01,428.84 958.01,460.27 1026.02,460.27 1033.21,453.08 1033.21,243.15 1005.13,215.07 967.61,215.07 953.64,229.03 953.64,298.84 937.07,315.42 675.28,315.42 670.92,319.78
  region net NetC3_2: 858.11,393.38 882.34,393.38 886.92,397.96 886.92,440.5 896.61,450.19 896.61,524.75 924.08,552.21 924.08,678.92 915.14,687.86 825.77,687.86 817.36,679.45 817.36,495.75 856.3,456.81 856.3,394.86
  pour cut-out: 1043.64,498.74 1041.43,496.53 909.6,496.53 906.81,499.32 906.81,521.56 927.72,542.49 927.72,707.71 806.4,707.71 801.62,712.5 801.84,712.72 801.84,760.54 804.89,763.58 804.95,763.51 1004.45,763.51 1043.64,724.32
  pour cut-out: 441.69,1127.65 441.69,1277.43 568.17,1277.43 568.17,1125.9
  region net 3V3: 494.35,1002.34 494.35,946.69 476.27,928.61 402.79,928.61 397.86,923.68 397.86,882.6 401.62,878.84 464.3,878.84 477.92,892.46 518.3,892.46 518.77,892.93 517.83,893.87 517.83,1002.34
  region net NetL2_1: 479.28,1059.14 479.28,1245.33 468.95,1255.66 428.82,1255.66 423.29,1250.13 423.29,1073.02 438.63,1057.68 477.6,1057.68
  region net +5V: 145.84,1018 367.17,1018 375.38,1009.79 470.98,1009.79 478.36,1002.41 478.36,953.59 468.11,943.33 148.08,943.33 143.05,948.35 143.05,1016.31
  region net NetF1_2: 150.97,1107.72 212.67,1107.72 306.3,1201.34 306.3,1310.67 312.79,1317.16 364.2,1317.16 369.08,1312.29 369.08,1166.71 238.54,1036.17 150.86,1036.17 143.92,1043.1 143.92,1104.28
Layer 1:
  rectangle net GND: 1395.31,1234.74 1683.26,1532.72
Layer 2:
  rectangle net GND: 1421.86,1227.06 1678.58,1517.38
Bottom Layer:
  rectangle net VDD: 1720.58,1160.31 1805.5,1198.05
  rectangle net GND: 1400.62,1245.36 1676.77,1522.1
  pour cut-out: 1244.22,915.87 1463.23,915.87 1463.23,812.12 1732.56,812.12 1732.56,508.3 1561.32,508.3 1561.32,660.79 1244.22,660.79
  region net VDD: 1319.42,1172.33 1386.36,1172.33 1390.82,1176.36 1390.82,1198.1 1386.83,1202.66 1314.89,1202.66 1312.86,1200.62 1312.86,1178.9
  region net VDDK: 1564.63,1130.83 1560.82,1134.64 1560.82,1213.94 1564.19,1217.31 1644.27,1217.31 1649.46,1212.12 1649.46,1156.21 1641.88,1148.64 1611.17,1148.64 1593.36,1130.83
  region net 1V2: 1175.17,1041.02 1175.17,985.5 1187.25,973.42 1598.87,973.42 1610.62,985.17 1610.62,1115.68 1605.74,1120.57 1559.35,1120.57 1552.03,1113.24 1552.03,1050.17 1544.61,1042.75 1176.9,1042.75

## Silkscreen, mask and mechanical layers (free items; w line width, h text height)
Top Overlay:
  lines w6: 674.09,1088.24 674.09,1374.05 744.33,1374.05 744.33,1088.24 674.09,1088.24 ; 1028,1086.77 1028,1389.01 1096.9,1389.01 1096.9,1086.77 1028,1086.77
  lines w8: 746.73,1159.04 773.5,1159.04 ; 746.73,1257.62 773.5,1257.62 ; 993.36,1159.04 1020.13,1159.04 ; 993.36,1257.62 1020.13,1257.62
  text "A7_X" at 540.64,3002.23 h35 r270
  text "A6_X" at 642.14,3002.23 h35 r270
  text "A5_X" at 743.63,3002.23 h35 r270
  text "A4_X" at 845.13,3002.23 h35 r270
  text "A3_X" at 946.63,3002.23 h35 r270
  text "A2_X" at 1048.12,3002.23 h35 r270
  text "A0_X" at 1251.12,3002.23 h35 r270
  text "A1_X" at 1149.62,2996.4 h35 r270
  text "GND" at 444.97,2967.24 h35 r270
  text "PA3" at 2354.84,2781.43 h35
  text "A_X" at 2006.69,2768.6 h35
  text "PB6" at 2354.84,2687.76 h35
  text "A_Y" at 2006.69,2674.93 h35
  text "GND" at 444.97,2647.63 h35 r270
  text "A7_Y" at 548.02,2647.63 h35 r270
  text "A6_Y" at 649.52,2647.63 h35 r270
  text "A5_Y" at 751.02,2647.63 h35 r270
  text "A4_Y" at 852.51,2647.63 h35 r270
  text "A3_Y" at 954.01,2647.63 h35 r270
  text "A2_Y" at 1055.51,2647.63 h35 r270
  text "A1_Y" at 1157.01,2647.63 h35 r270
  text "A0_Y" at 1258.5,2647.63 h35 r270
  text "PB14" at 962.35,2498.34 h35 r270
  text "PB12" at 1062.4,2498.34 h35 r270
  text "PA12" at 1162.44,2498.34 h35 r270
  text "PA10" at 1262.49,2498.34 h35 r270
  text "PD12" at 1462.58,2498.34 h35 r270
  text "PD10" at 1562.62,2498.34 h35 r270
  text "PB10" at 1762.72,2498.34 h35 r270
  text "PC14" at 1962.81,2498.34 h35 r270
  text "PC12" at 2062.85,2498.34 h35 r270
  text "PC10" at 2162.9,2498.34 h35 r270
  text "GND" at 462.12,2469.18 h35 r270
  text "GND" at 562.17,2469.18 h35 r270
  text "GND" at 662.21,2469.18 h35 r270
  text "PD5" at 762.26,2469.18 h35 r270
  text "PD3" at 862.31,2469.18 h35 r270
  text "PA8" at 1362.53,2469.18 h35 r270
  text "PD8" at 1662.67,2469.18 h35 r270
  text "PB8" at 1862.76,2469.18 h35 r270
  text "3V3" at 2262.94,2469.18 h35 r270
  text "GND" at 462.12,2136.74 h35 r270
  text "GND" at 562.38,2136.74 h35 r270
  text "GND" at 662.63,2136.74 h35 r270
  text "VDDK" at 762.88,2136.74 h35 r270
  text "PD4" at 863.13,2136.74 h35 r270
  text "PB15" at 963.38,2136.74 h35 r270
  text "PB13" at 1063.64,2136.74 h35 r270
  text "PA15" at 1163.89,2136.74 h35 r270
  text "PA11" at 1264.14,2136.74 h35 r270
  text "PA9" at 1364.39,2136.74 h35 r270
  text "PD13" at 1464.65,2136.74 h35 r270
  text "PD11" at 1564.9,2136.74 h35 r270
  text "PD9" at 1665.15,2136.74 h35 r270
  text "PB11" at 1765.4,2136.74 h35 r270
  text "PB9" at 1865.66,2136.74 h35 r270
  text "PC15" at 1965.91,2136.74 h35 r270
  text "PC13" at 2066.16,2136.74 h35 r270
  text "PC11" at 2166.41,2136.74 h35 r270
  text "3V3" at 2266.66,2136.74 h35 r270
  text "GND" at 2227.79,1936.14 h35
  text "GND" at 2582.14,1936.14 h35
  text "PC9" at 2581.14,1841.35 h35
  text "GND" at 2227.79,1836.07 h35
  text "LED1" at 640.79,1833.01 h35
  text "3V3" at 1001.17,1829.24 h35
  text "PC8" at 2227.79,1736.01 h35
  text "PB7" at 2602.66,1735.2 h35
  text "LED2" at 629.13,1732.56 h35
  text "GND" at 1001.17,1730.04 h35
  text "USER" at 36.59,1700.39 h35 r270
  text "PB5" at 2227.79,1635.94 h35
  text "PB4" at 2582.14,1635.94 h35
  text "KEY" at 664.11,1632.1 h35
  text "PA13" at 1001.17,1630.85 h35
  text "PB3" at 2225.03,1535.88 h35
  text "PB2" at 2582.14,1535.88 h35
  text "GND" at 664.11,1531.65 h35
  text "PA14" at 1001.17,1531.65 h35
  text "PB1" at 2236.69,1435.81 h35
  text "PB0" at 2582.14,1435.81 h35
  text "VBUS_USB" at 1031.15,1381.13 h35 r270
  text "VBUS_CC" at 681.51,1364.84 h35 r270
  text "PA7" at 2225.03,1335.75 h35
  text "PA6" at 2582.14,1335.75 h35
  text "PA5" at 2225.03,1235.68 h35
  text "PA4" at 2582.14,1235.68 h35
  text "OFF" at 16.7,1190.4 h35 r270
  text "PA1" at 2581.64,1140.27 h35
  text "PA2" at 2225.03,1135.62 h35
  text "PA0" at 2225.03,1035.55 h35
  text "VREF+" at 2577.64,1035.55 h35
  text "GND" at 666.33,1025.49 h35
  text "GND" at 1007.83,1025.49 h35
  text "ON" at 16.7,1016.64 h35 r270
  text "VREF-" at 2155.05,935.49 h35
  text "PC7" at 2581.64,935.49 h35
  text "PC6" at 2225.03,835.42 h35
  text "PC5" at 2582.14,835.42 h35
  text "PC4" at 2225.03,735.36 h35
  text "PC3" at 2582.14,735.36 h35
  text "PC2" at 2225.03,635.29 h35
  text "PC1" at 2582.14,635.29 h35
  text "PC0" at 2225.03,535.23 h35
  text "PD15" at 2582.14,535.23 h35
  text "PD14" at 2195.87,435.16 h35
  text "PD2" at 2582.14,435.16 h35
  text "PD1" at 2236.69,335.1 h35
  text "PD0" at 2582.14,335.1 h35
  text "PD7" at 1920.23,289.2 h35
  text "VDD" at 2225.03,235.03 h35
  text "VDD" at 2582.14,235.03 h35
  text "PD6" at 1920.23,195.02 h35
  text "VDD" at 2225.03,134.97 h35
  text "VDD" at 2582.14,134.97 h35
  text "CH32X315MCU-R0-1v0" at 83.6,35.74 h40
Mechanical 1:
  the board outline again, w10

## Text inside footprints (layer, text, board x,y; h text height)
D1: Top Overlay "+" at 339.2,735.16 h40 r90
D2: Top Overlay "+" at 387.97,1749.54 h40 r90
D3: Top Overlay "+" at 387.97,1605.38 h40 r90